# Altium PCB PCBLedPhatHongNgoai.PcbDoc
Units mil, origin at the board's own origin, x right, y up, seen from the top; angles counter-clockwise.
Board outline 3850 x 3800 mil, 2 copper layers (Top Layer, Bottom Layer); 16 components, 12 nets, 74 pads, 0 vias.
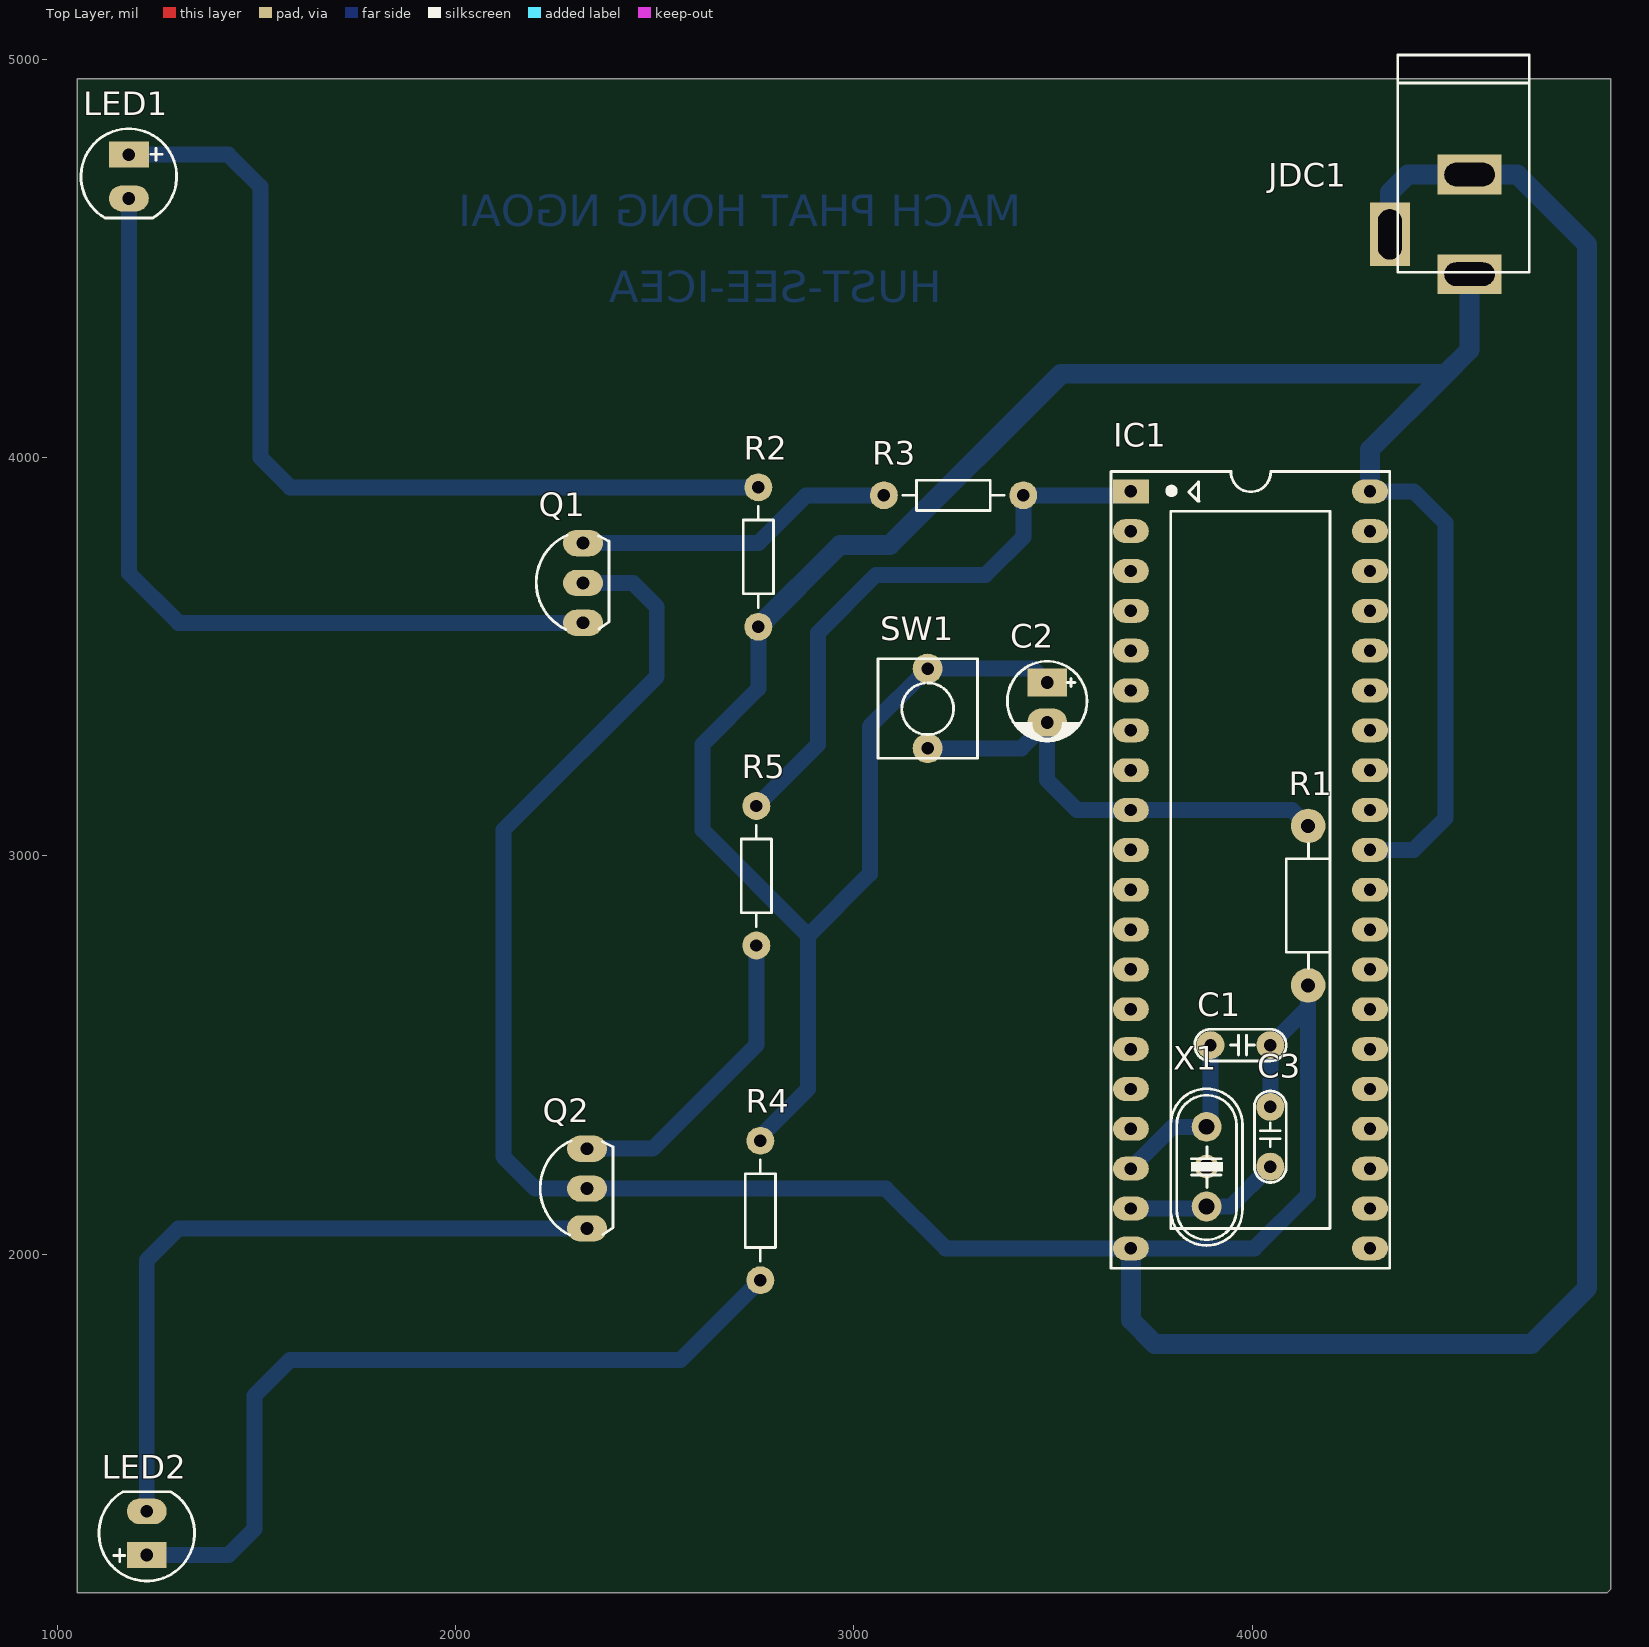
[diagram p0: Top Layer view]
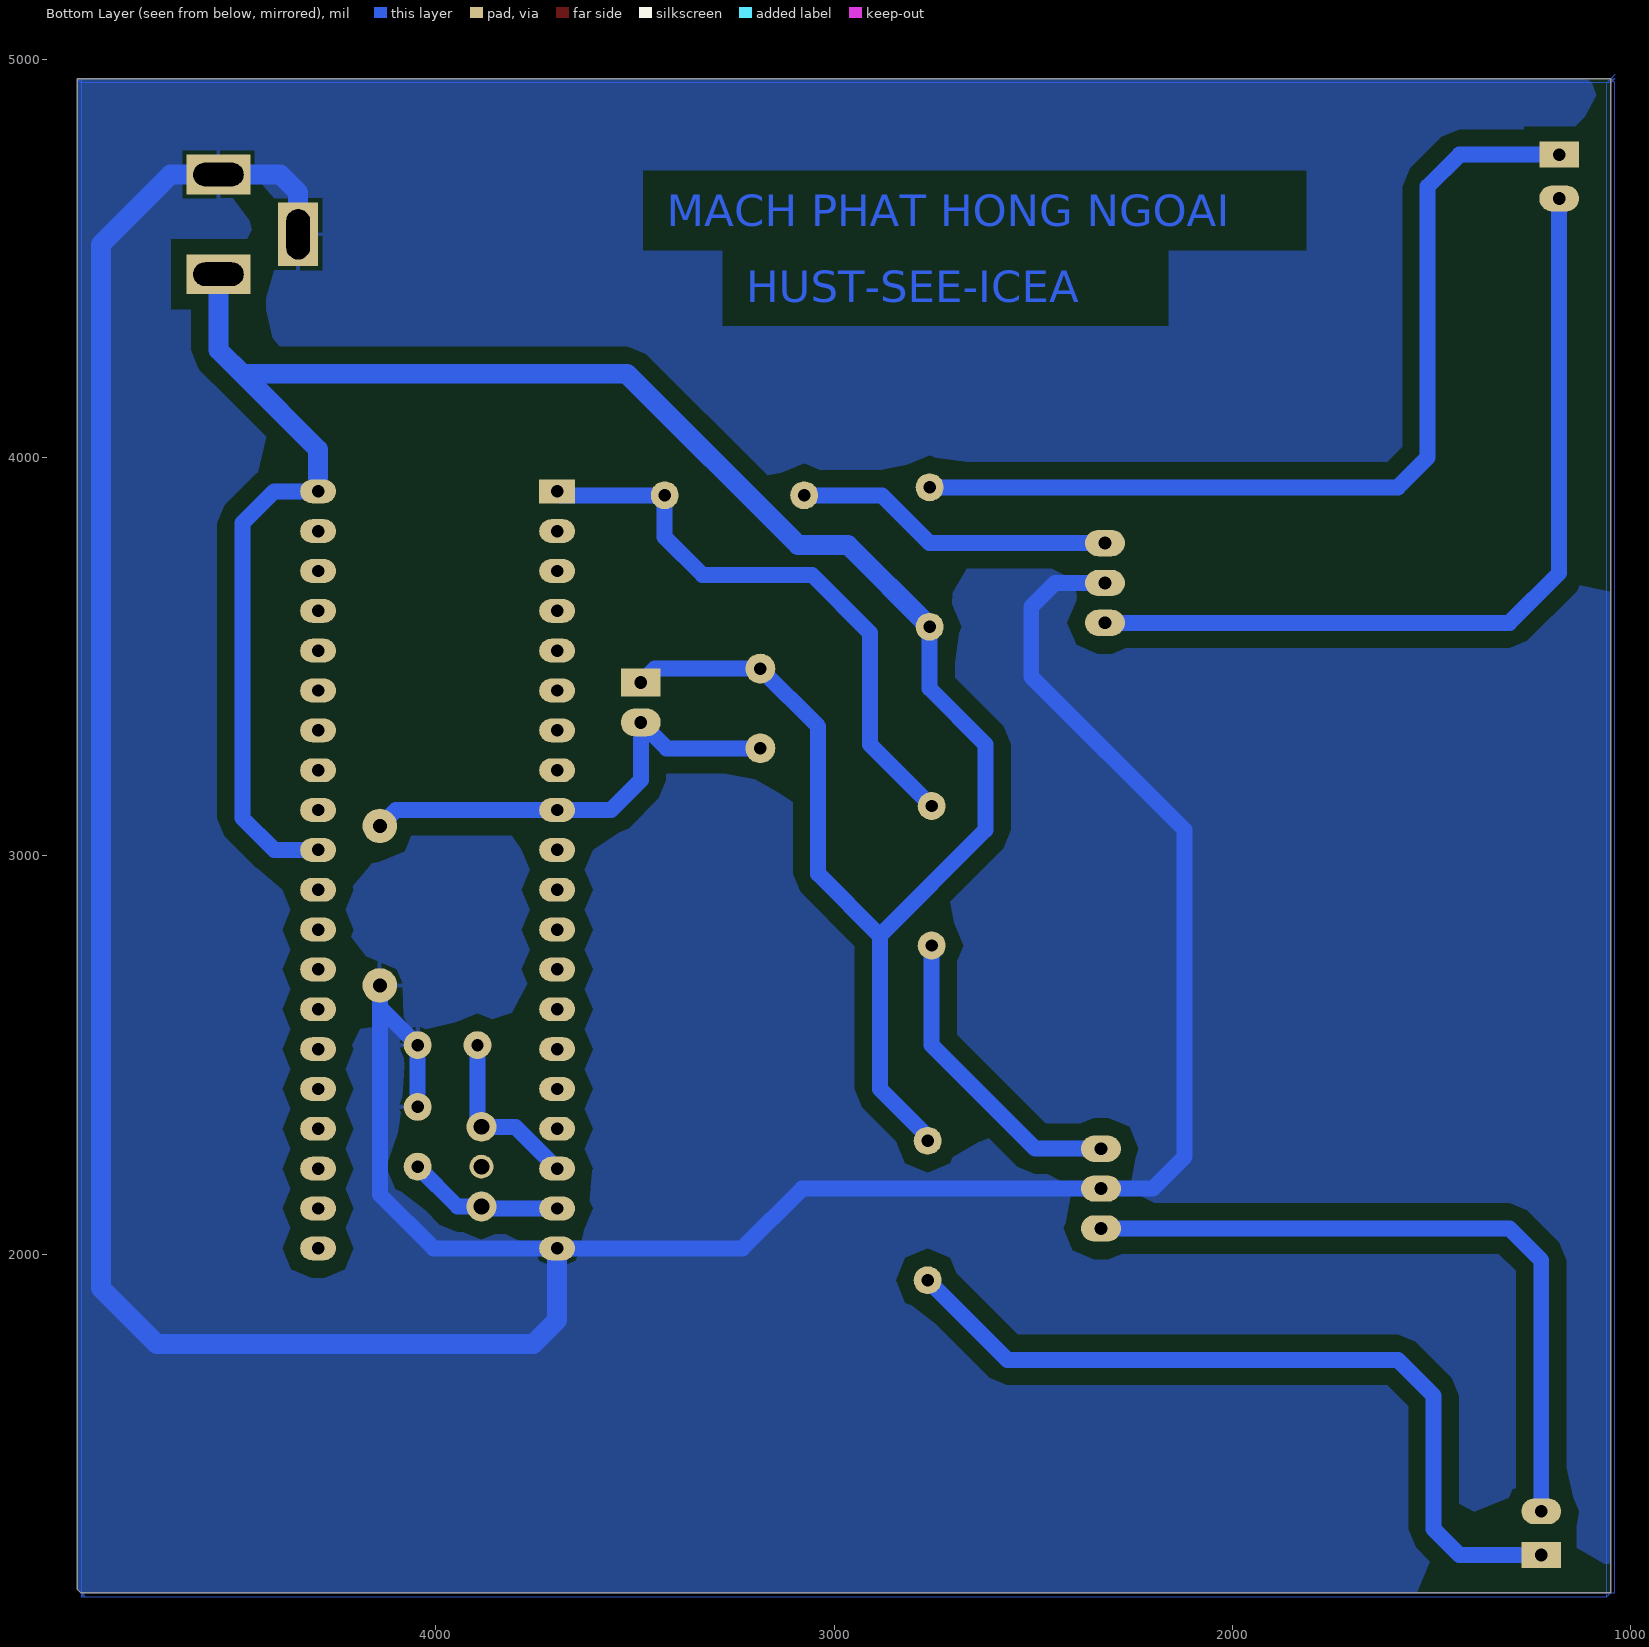
[diagram p1: Bottom Layer view, seen from below]
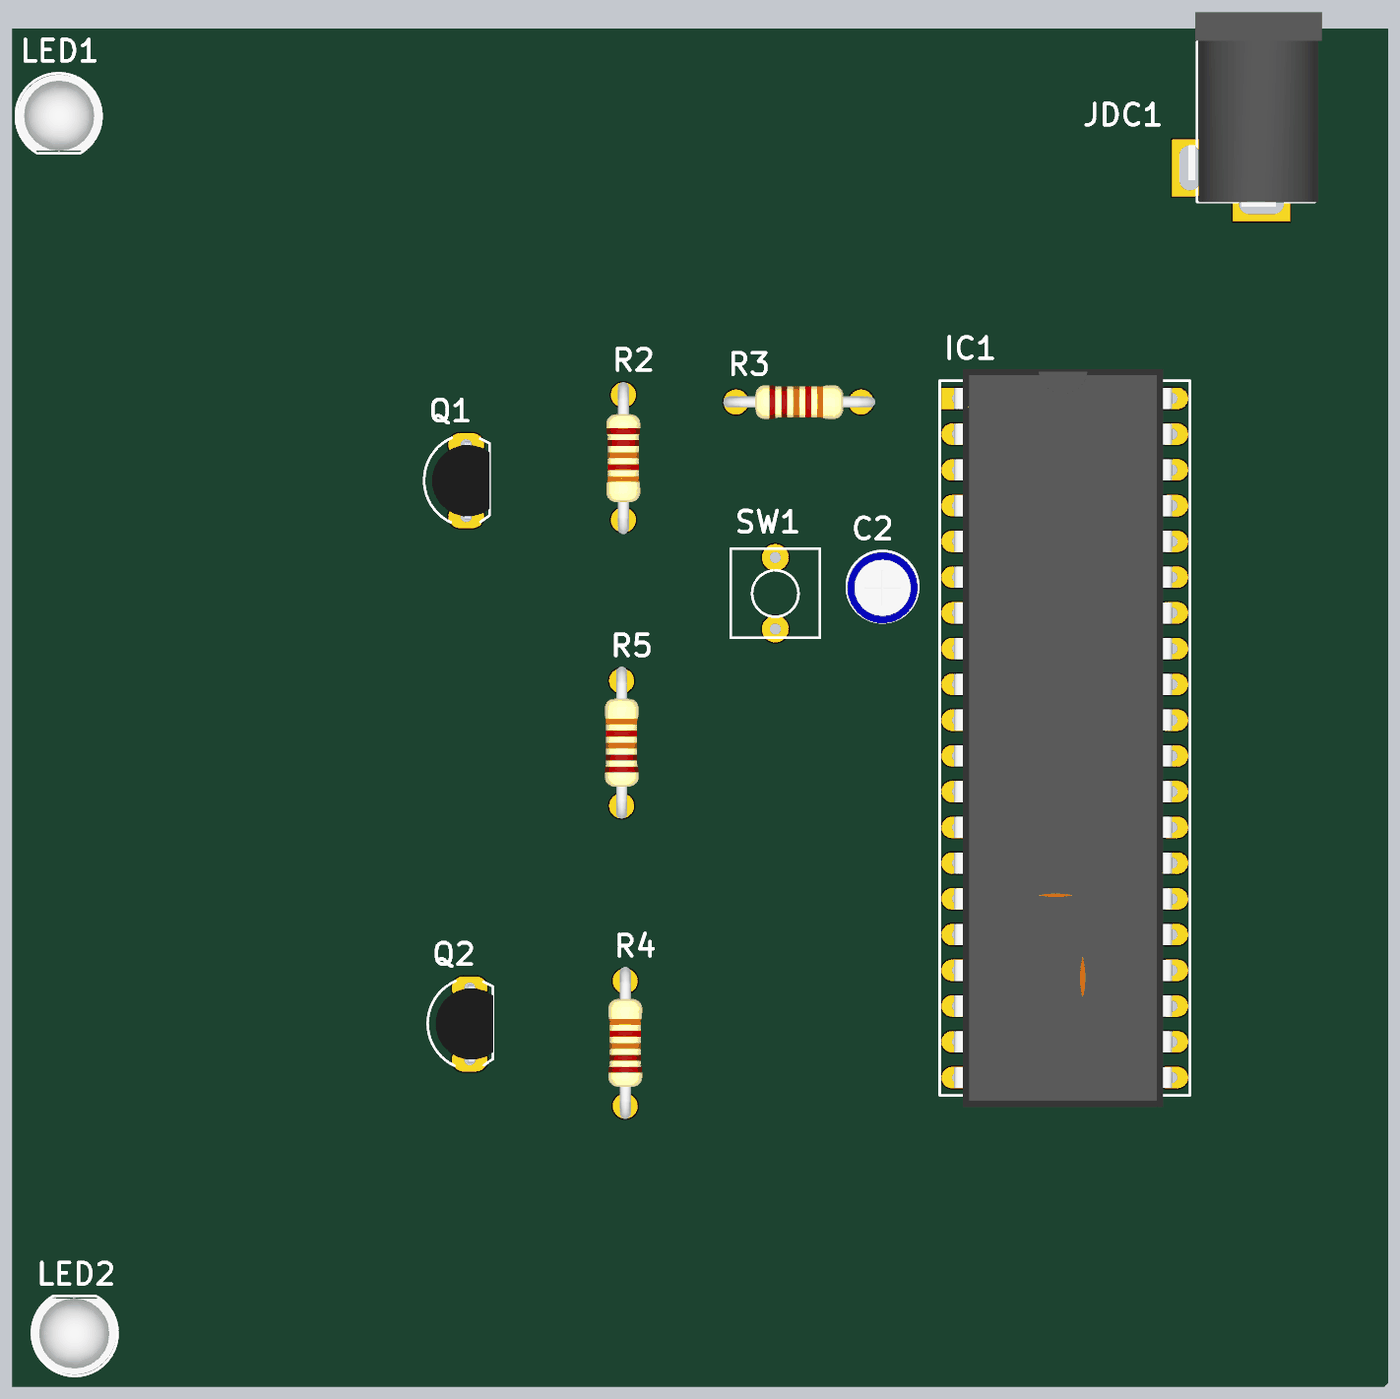
[diagram p2: 3D render of the assembled board from above, using the file's embedded part models]

## Layer stack, top to bottom
Top Solder: solder mask 0.4, Solder Resist, Dk 3.5
Top Layer: signal copper 1.4
Dielectric 1: dielectric 12.6, FR-4, Dk 4.8
Bottom Layer: signal copper 1.4
Bottom Solder: solder mask 0.4, Solder Resist, Dk 3.5

## Board outline
1050,4950 4900,4950 4900,1160 4890,1150 1050,1150

## Design rules (kind name [scope] priority, off if disabled: settings)
Clearance [All] p1: gap=39.37
PolygonConnect [All] p1: connectstyle=Relief reliefconductorwidth=10 reliefentries=4 polygonreliefangle="90 Angle" airgapwidth=10
RoutingVias [All] p1: holewidth=39.37 width=78.74 viastyle="Through Hole" minholewidth=39.37 minwidth=78.74 maxholewidth=39.37 maxwidth=78.74
SolderMaskExpansion [All] p1: expansion=4
UnpouredPolygon [All] p1: allowunpoured=FALSE
Width [All] p1: maxlimit=70 minlimit=30 preferedwidth=50
29 further rules are at their usual default settings.

## Components (designator, comment, footprint, x,y, rotation, side; value= is the part's Value field where it differs from the comment)
C1 "103" CN1.5 4045,2525 r180 top
C2 "10uF" CP1/2 3485,3435 r270 top
C3 "103" CN1.5 4045,2370 r270 top
IC1 "AT89S52" DIP40/W0.6 3695,3915 r270 top
JDC1 "Jac DC" DC-IN 4445,4585 r270 top
LED1 "LED" LED-5TRED 1180,4705 r270 top
LED2 "LED" LED-5TRED 1225,1300 r90 top
Q1 "A1015" QTO-92 2320,3685 r90 top
Q2 "A1015" QTO-92 2330,2165 r90 top
R1 "1k" R1/2W4 4140,2675 r90 top
R2 "1k" R1/4W 2760,3575 r90 top
R3 "1k" R1/4W 3425,3905 r180 top
R4 "1k" R1/4W 2765,2285 r270 top
R5 "1k" R1/4W 2755,3125 r270 top
SW1 "SW" SW2 3185,3270 r90 top
X1 "4Mhz" XT2 3885,2220 r90 top

## Footprints (in the part's own frame and the unit in brackets; to place one, negate y for a bottom-side part, rotate by r counter-clockwise, add the part's x,y. Pads: shape width x height; smd on the part's side, far side on the other; paste and mask are expansions set on the pad)
CN1.5 [mil]
  round 70 hole 31: 1(0,0) 2(150,0)
  silkscreen extent -40,-40 190,40, body extent -40,-33 190,33, height 235
CP1/2 [mil] "Tu hoa < 22uF/16>50V"
  rect 70x100 hole 32: 1(0,0)
  oval 70x100 hole 32: 2(100,0)
  silkscreen extent -53,-100 146,100, body extent -49,-99 149,99, height 287
DC-IN [mil] "Jac DC input"
  rect 100x160 hole 59.06 slot 125.98 at 90 deg: 1(125,100) 2(-125,100)
  rect 160x100 hole 59.06 slot 125.98 at 0 deg: 3(25,-100)
  silkscreen extent -425,-80 120,250, body extent -410,-105 134,269, height 434
DIP40/W0.6 [mil] "40 PIN, W 600mil, Pin to pin 100mil"
  rect 60x90 hole 31: 1(0,0)
  oval 60x90 hole 31: 2(100,0) 3(200,0) 4(300,0) 5(400,0) 6(500,0) 7(600,0) 8(700,0) 9(800,0) 10(900,0) 11(1000,0) 12(1100,0) 13(1200,0) 14(1300,0) 15(1400,0) 16(1500,0) 17(1600,0) 18(1700,0) 19(1800,0) 20(1900,0) 21(1900,600) 22(1800,600) 23(1700,600) 24(1600,600) 25(1500,600) 26(1400,600) 27(1300,600) 28(1200,600) 29(1100,600) 30(1000,600) 31(900,600) 32(800,600) 33(700,600) 34(600,600) 35(500,600) 36(400,600) 37(300,600) 38(200,600) 39(100,600) 40(0,600)
  silkscreen extent -50,-50 1950,650, body extent -82,-10 1982,600, height 224
LED-5TRED [mil] "LED 2 PIN, 5 ly , Only colour, pin to pin 110mil"
  rect 65x100 hole 32: 1(-55,0)
  oval 65x100 hole 32: 2(55,0)
  silkscreen extent -120,-120 104,120, body extent -116,-117 98,120, height 339
QTO-92 [mil] "TO-92"
  oval 66x100 hole 32: 1(-100,0) 2(0,0) 3(100,0)
  silkscreen extent -117,-65 120,118, body extent -109,-66 109,95, height 245
R1/2W4 [mm] "R 1/2W, 2 pin, 400mil"
  round 2.2 hole 0.9: 1(0,0) 2(10.16,0)
  silkscreen extent 1.07,-1.4 9.04,1.4, body extent -0.29,-1.16 10.51,1.24, height 2.32
R1/4W [mil] "R 1/4W, 2 Pin, 350mil"
  round 70 hole 31: 1(0,0) 2(350,0)
  silkscreen extent 48,-38 302,38, body extent -40,-47 386,47, height 111
SW2 [mil] "SW button 2pin, 250x 250 mil"
  round 75 hole 31: 1(0,0) 2(200,0)
  silkscreen extent -25,-125 225,125
XT2 [mm] "Footpin for Crystal 2 pin"
  round 1.524 hole 1: 0(0,0)
  round 1.905 hole 1: 1(-2.54,0) 2(2.54,0)
  silkscreen extent -5.03,-2.29 4.96,2.29, body extent -5.93,-2.36 5.42,2.29, height 3.5

## Part data
C1 C3: library part CN1.5, "Cap np 682pF => 104pF"
C2: library part CP1, "Cap P  0,1uF < 22uF , 16 - 50V"
IC1: "AT89S52, 8k Byte Flash Memory , 40 Pin"
JDC1: library part "JACK DC", "Jac DC input"
LED1 LED2: "LED Single colour Green and Red"
Q1 Q2: "PNP 600mW, ECB"
R1: library part R1/4W, "Resistor 1/4W"
R2 R3 R4 R5: library part R, "Resistor 1/4W"
SW1: library part SW2, "Switch button 2 pin"
X1: library part XT2, "Crystal For all Crystal 2pin."

## Nets (pads, with @x,y where several pads share a name; then routed paths per layer and width w, separated by ;. In a path a pad name is that pad's centre, name@x,y a point inside that pad or via, vN(x,y) a via of type N, cw(c..) or ccw(c..) an arc to the next point about the centre after c; other vN are vias at no path point)
AL1: C1.2 IC1.18 X1.2 | length 442.6
  Bottom Layer w40: IC1.18 3800,2320 X1.2 3895,2330 C1.2
AL2: C3.2 IC1.19 X1.1 | length 393.5
  Bottom Layer w40: IC1.19 3880,2115 X1.1 3945,2120 C3.2
GND: C1.1 C3.1 IC1.20 JDC1.2 JDC1.3 Q1.2 Q2.2 R1.1 | length 9453
  Bottom Layer w40: Q1.2 2445,3685 2505,3625 2505,3450 2120,3065 2120,2245 2200,2165 Q2.2 3080,2165 3230,2015 IC1.20 4005,2015 4140,2150 4140,2620 ; C3.1@4055,2375 4045,2385 C1.1 4140,2620 ; R1.1 4140,2620
  Bottom Layer w50: IC1.20 3695,1835 3755,1775 4700,1775 4840,1915 4840,4535 4665,4710 JDC1.2 4390,4710 4345,4665 JDC1.3
NetLED1_1: LED1.1 R2.2 | length 2324.2
  Bottom Layer w40: LED1.1 1430,4760 1510,4680 1510,4000 1585,3925 R2.2
NetLED1_2: LED1.2 Q1.1 | length 2131.8
  Bottom Layer w40: LED1.2 1180,3710 1305,3585 Q1.1
NetLED2_1: LED2.1 R4.2 | length 2022
  Bottom Layer w40: LED2.1 1430,1245 1495,1310 1495,1645 1585,1735 2565,1735 R4.2
NetLED2_2: LED2.2 Q2.1 | length 1768.1
  Bottom Layer w40: LED2.2 1225,1985 1305,2065 Q2.1
NetQ1_3: Q1.3 R3.2 | length 804.7
  Bottom Layer w40: Q1.3 2760,3785 2880,3905 R3.2
NetQ2_3: Q2.3 R5.2 | length 782.7
  Bottom Layer w40: Q2.3 2495,2265 2755,2525 R5.2
RST: C2.2 IC1.9 R1.2 SW1.1 | length 1174.6
  Bottom Layer w40: SW1.1 3420,3270 C2.2 3485,3190 3560,3115 IC1.9 4100,3115 R1.2
TINHIEU: IC1.1 R3.1 R5.1 | length 1478.6
  Bottom Layer w40: R5.1 2910,3280 2910,3560 3055,3705 3330,3705 3425,3800 R3.1 IC1.1@3685,3905
VCC: C2.1 IC1.31 IC1.40 JDC1.1 R2.1 R4.1 SW1.2 | length 6434.7
  Bottom Layer w40: R2.1 2760,3420 2620,3280 2620,3065 2885,2800 ; R4.1 2765,2295 2885,2415 2885,2800 ; C2.1 3450,3470 SW1.2 3040,3325 3040,2955 2885,2800 ; IC1.31 4405,3015 4485,3095 4485,3835 4405,3915 IC1.40
  Bottom Layer w50: R2.1 2965,3780 3090,3780 3520,4210 4470,4210 4477.5,4202.5 ; IC1.40 4295,4020 4477.5,4202.5 ; JDC1.1 4545,4270 4477.5,4202.5
pads on no net: IC1.2 IC1.3 IC1.4 IC1.5 IC1.6 IC1.7 IC1.8 IC1.10 IC1.11 IC1.12 IC1.13 IC1.14 IC1.15 IC1.16 IC1.17 IC1.21 IC1.22 IC1.23 IC1.24 IC1.25 IC1.26 IC1.27 IC1.28 IC1.29 IC1.30 IC1.32 IC1.33 IC1.34 IC1.35 IC1.36 IC1.37 IC1.38 IC1.39 X1.0

## Polygon pours and split planes (outlines as drawn)
GND on Bottom Layer "Bottom Layer-No Net" (solid, remove dead copper, pour order 27): 1050,4950 4900,4950 4900,1160 4890,1150 1050,1150 1050,4940 1040,4950
GND on Bottom Layer "Bottom Layer-No Net" (solid, shelved, pour order 10): 1050,4950 4900,4950 4890,4940 4890,1140 1060,1140 1050,1150
GND on Bottom Layer "Bottom Layer-No Net" (solid, shelved, pour order 12): 1040,4960 1050,4950 4890,4950 4890,1140 4880,1150 1040,1150 1040,4940 1050,4950
GND on Bottom Layer "Bottom Layer-No Net" (solid, shelved, pour order 14): 1050,4950 4890,4950 4890,1150 1050,1150 1050,4950
GND on Bottom Layer "Bottom Layer-No Net" (solid, shelved, pour order 16): 1040,4950 1050,4940 4890,4940 4890,1150 4880,1140 1060,1140 1060,4940 1050,4950

## Other copper
Bottom Layer:
  text "MACH PHAT HONG NGOAI" at 3420,4580 h80
  text "HUST-SEE-ICEA" at 3220,4390 h80